# EAGLE board BPW5004-Zigbee (EAGLE 5.06)
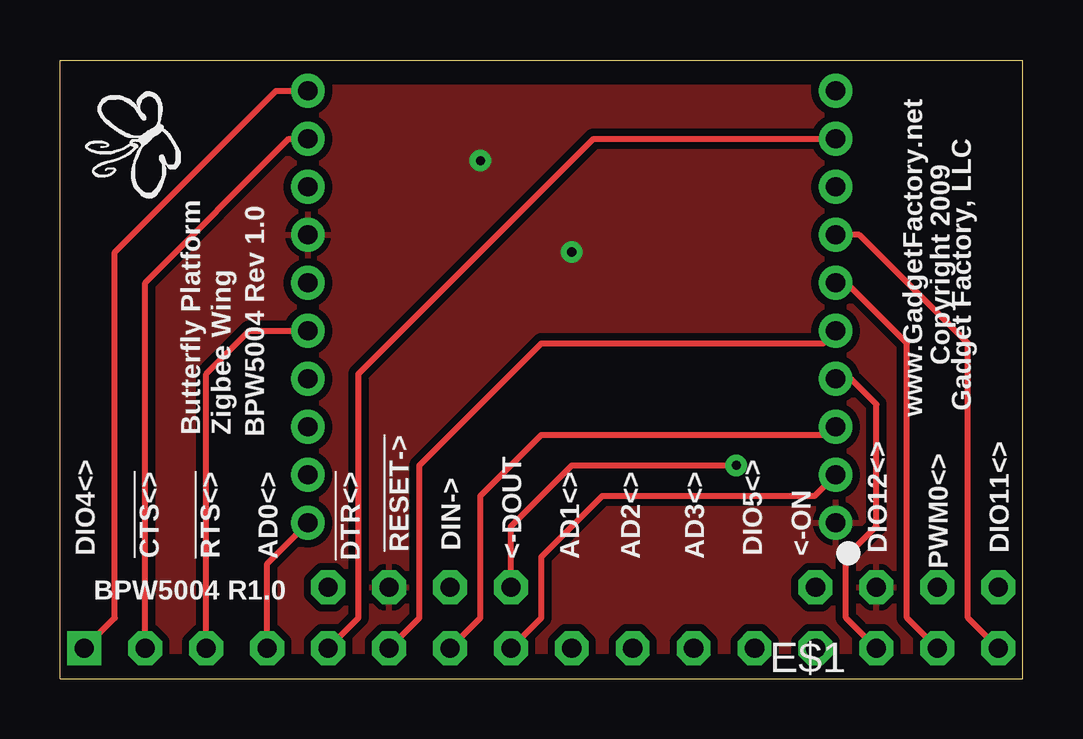
[diagram p0: board, top side]
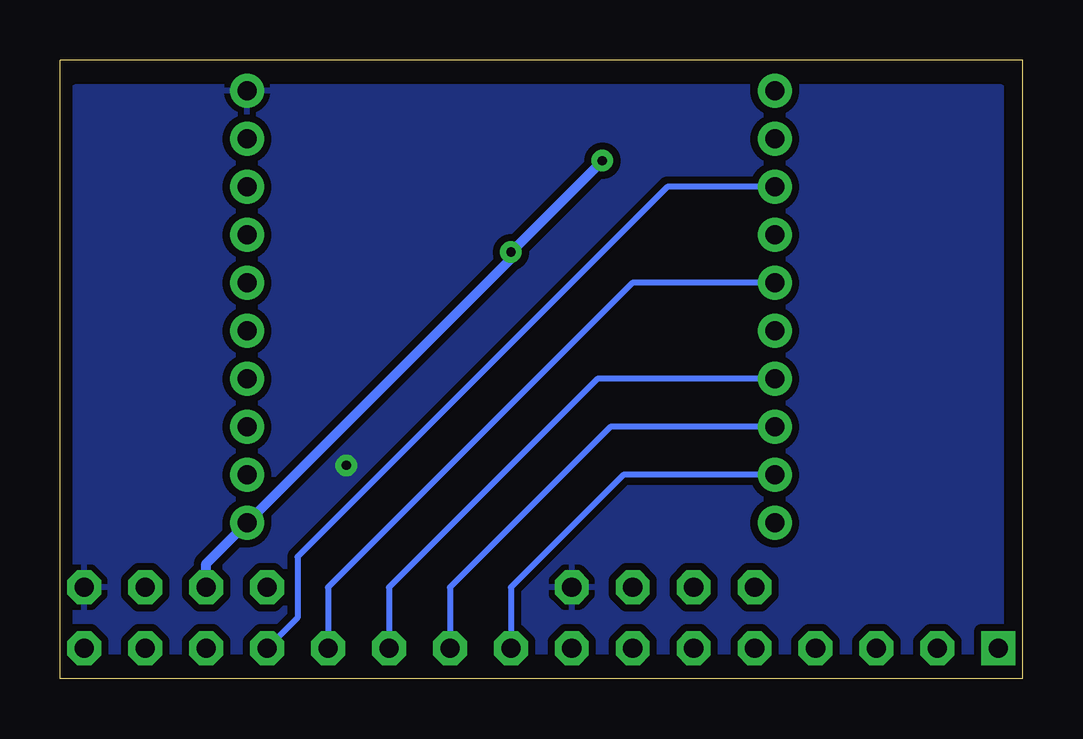
[diagram p1: board, bottom side, seen from below]

Size 40.13 x 25.78 mm. Coordinates in mm from the lower left corner, seen from the top.
Outline: 0,0 40.13,0 40.13,25.78 0,25.78 0,0
Copper layers (1*16): Top 0.035mm / dielectric 1.5mm / Bottom 0.035mm
Design rules "SparkFun_Derived_GoldePheonix_10mil *": minimum track width 10mil, minimum drill 15mil, track to track 8mil, track to pad 8mil, pad to pad 8mil, via to via 8mil, smd to smd 8mil, copper to edge 10mil, drill to drill 8mil, minimum pad ring 12mil, minimum via ring 10mil, stop-mask expansion 4mil, vias tented up to drill 18mil, thermal gap 10mil

## Footprints (pad centres in the part's own frame; a part is rotated, then mirrored left to right if it is on the bottom)
XBEE = drill 0.8 pad 1.27 round: 1 -11,9; 2 -11,7; 3 -11,5; 4 -11,3; 5 -11,1; 6 -11,-1; 7 -11,-3; 8 -11,-5; 9 -11,-7; 10 -11,-9; 11 11,-9; 12 11,-7; 13 11,-5; 14 11,-3; 15 11,-1; 16 11,1; 17 11,3; 18 11,5; 19 11,7; 20 11,9
WING_16BIT = drill 0.8 octagon: 2V5@1 36.83,3.81; 2V5@2 16.51,3.81; 3V3@1 34.29,3.81; 3V3@2 13.97,3.81; 5V@1 31.75,3.81; 5V@2 11.43,3.81; B2 3.81,1.27; B3 6.35,1.27; B4 8.89,1.27; B5 11.43,1.27; B6 13.97,1.27; B7 16.51,1.27; B8 19.05,1.27; B9 21.59,1.27; B10 24.13,1.27; B11 26.67,1.27; B12 29.21,1.27; B13 31.75,1.27; B14 34.29,1.27; B15 36.83,1.27; B16 39.37,1.27; GND@1 39.37,3.81; GND@2 19.05,3.81 | drill 0.8 square: B1 1.27,1.27

## Placement (x,y rotation side)
E$1  [XBEE]  21.34,15.49 180 top
E$2  [WING_16BIT]  -0.25,0 0 top

## Library data of the parts
E$1 = GadgetFactory
E$2 = GadgetFactory_Pub

## Nets
3V3: E$1.1 E$1.14 E$2.3V3@1 E$2.3V3@2
!CS: E$1.6 E$2.B15
DAT1: E$1.20 E$2.B4
DAT2: E$1.9 E$2.B5
GND: E$1.10 E$2.GND@1 E$2.GND@2
MOSI: E$1.5 E$2.B6
S$1: E$1.16 E$2.B3
S$2: E$1.12 E$2.B2
S$3: E$1.2 E$2.B8
S$4: E$1.3 E$2.B7
S$5: E$1.4 E$2.B14
S$6: E$1.7 E$2.B16
S$7: E$1.11 E$2.B1
S$8: E$1.13 E$2.B13
S$9: E$1.15 E$2.B12
S$10: E$1.17 E$2.B11
S$11: E$1.18 E$2.B10
S$12: E$1.19 E$2.B9

## Tracks (layer width: path | path; a pad name or v marks a point on that pad's centre or on a via)
3V3  (via drill 0.38)
  Bottom 0.406: E$2.3V3@1 34.04,4.79 E$1.1 21.34,17.49 v21.34,17.78 v17.53,21.59
  pour Top (isolate 0.305): 0.89,1.14 0.89,24.64 39.5,24.64 39.5,1.14
!CS
  Top 0.254: E$1.6 32.78,16.49 35.31,13.97 35.31,2.54 E$2.B15
DAT1
  Top 0.254: E$2.B4 8.64,4.79 E$1.20
DAT2
  Top 0.254: E$1.9 22.24,22.49 12.45,12.7 12.45,2.54 E$2.B5
GND  (via drill 0.38)
  Top 0.254: E$2.GND@2 18.8,6.35 21.34,8.89 v28.19,8.89
  pour Bottom (isolate 0.305): 0.89,1.14 0.89,24.64 39.5,24.64 39.5,1.14
MOSI
  Top 0.254: E$1.5 31.81,13.97 20.07,13.97 14.99,8.89 14.99,2.54 E$2.B6
S$1
  Top 0.254: E$1.16 7.89,14.49 6.1,12.7 E$2.B3
S$2
  Top 0.254: E$1.12 9.54,22.49 3.56,16.51 E$2.B2
S$3
  Top 0.254: E$1.2 31.46,7.62 22.61,7.62 20.07,5.08 20.07,2.54 E$2.B8
S$4
  Top 0.254: E$1.3 32,10.16 20.07,10.16 17.53,7.62 17.53,2.54 E$2.B7
S$5
  Top 0.254: E$1.4 32.97,12.49 34.04,11.43 34.04,6.35 32.77,5.08 32.77,2.54 E$2.B14
S$6
  Top 0.254: E$1.7 33.32,18.49 37.85,13.97 37.85,2.54 E$2.B16
S$7
  Top 0.254: E$1.11 9,24.49 2.29,17.78 2.29,2.54 E$2.B1
S$8
  Bottom 0.254: E$1.13 14.81,20.49 30.23,5.08 30.23,2.54 E$2.B13
S$9
  Bottom 0.254: E$1.15 16.27,16.49 28.96,3.81 E$2.B12
S$10
  Bottom 0.254: E$1.17 17.73,12.49 26.42,3.81 E$2.B11
S$11
  Bottom 0.254: E$1.18 17.19,10.49 23.88,3.81 E$2.B10
S$12
  Bottom 0.254: E$1.19 16.65,8.49 21.34,3.81 E$2.B9

## Text on the board
tPlace: Copyright 2009 | www.GadgetFactory.net | Gadget Factory, LLC | Butterfly Platform | Zigbee Wing | BPW5004 Rev 1.0 | !RESET-> | DIO12<> | DIO11<> | DIO4<> | !CTS<> | !RTS<> | AD0<> | !DTR<> | <-DOUT | AD1<> | AD2<> | AD3<> | DIO5<> | PWM0<> | DIN-> | <-ON | BPW5004 R1.0